# Altium PCB PCB.ESP8266.PcbDoc
Units mil, origin at the board's own origin, x right, y up, seen from the top; angles counter-clockwise.
Board outline 1050 x 1810 mil, 2 copper layers (Top Layer, Bottom Layer); 27 components, 25 nets, 139 pads, 161 vias.
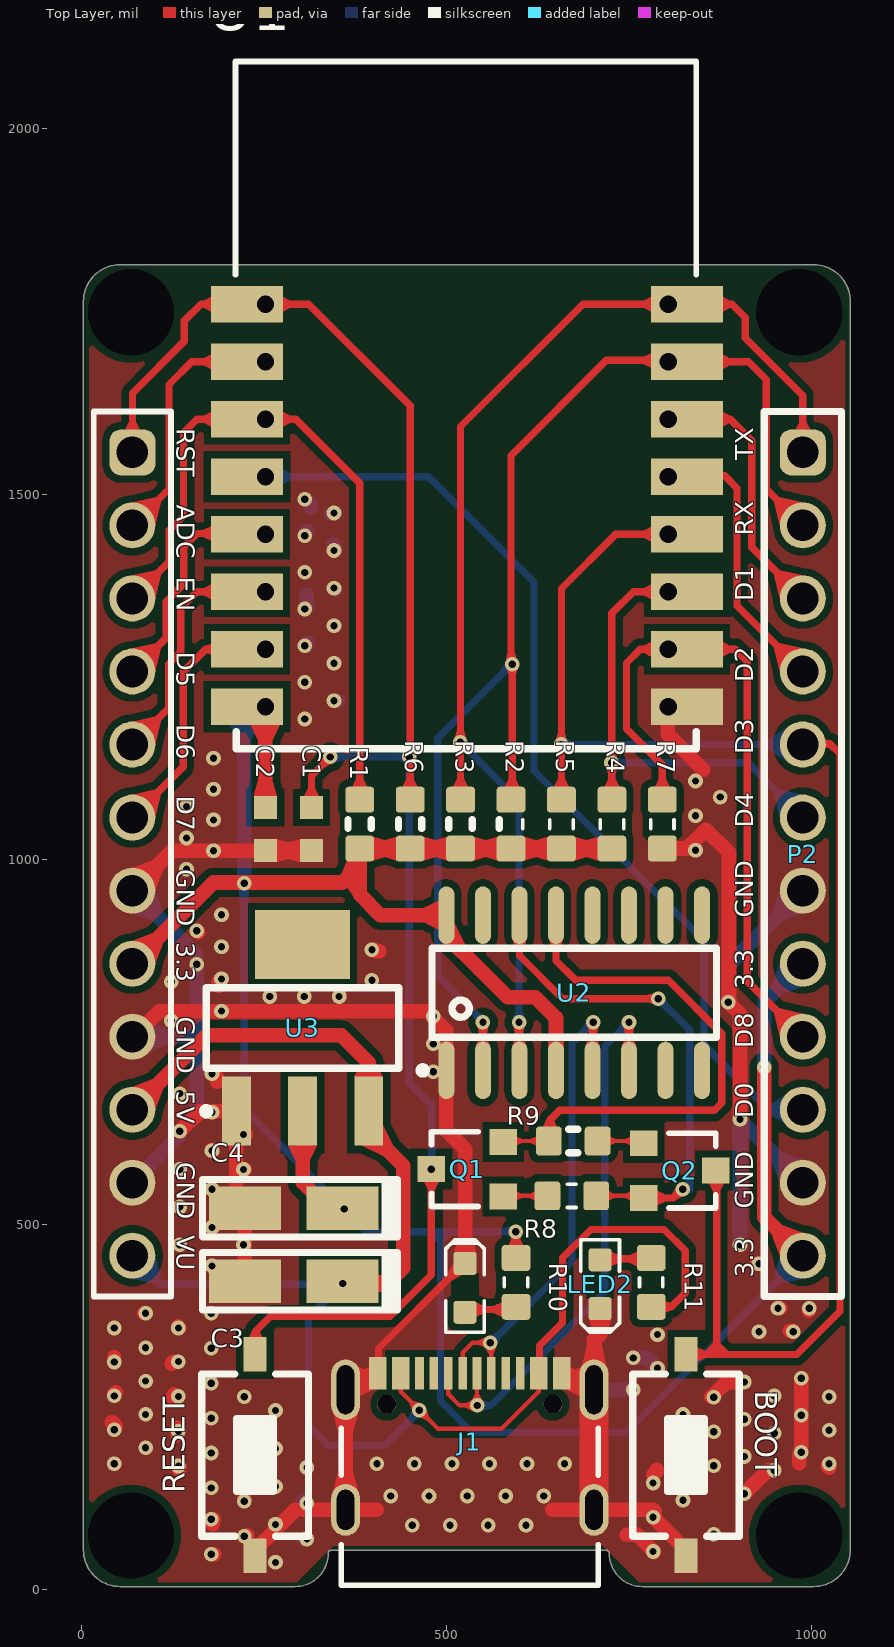
[diagram p0: Top Layer view]
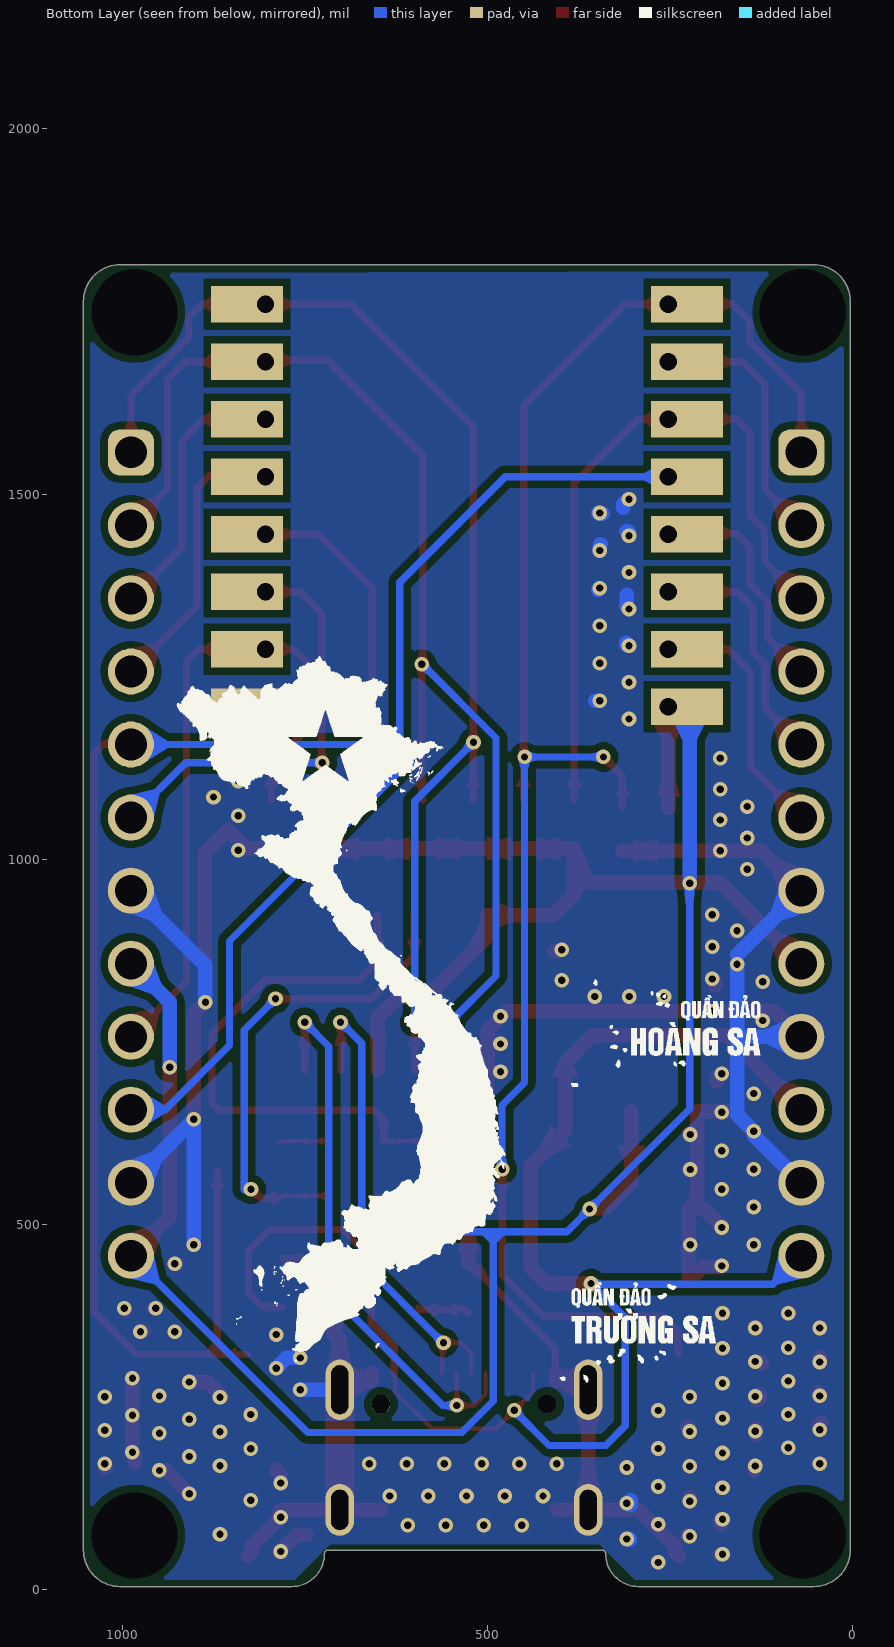
[diagram p1: Bottom Layer view, seen from below]
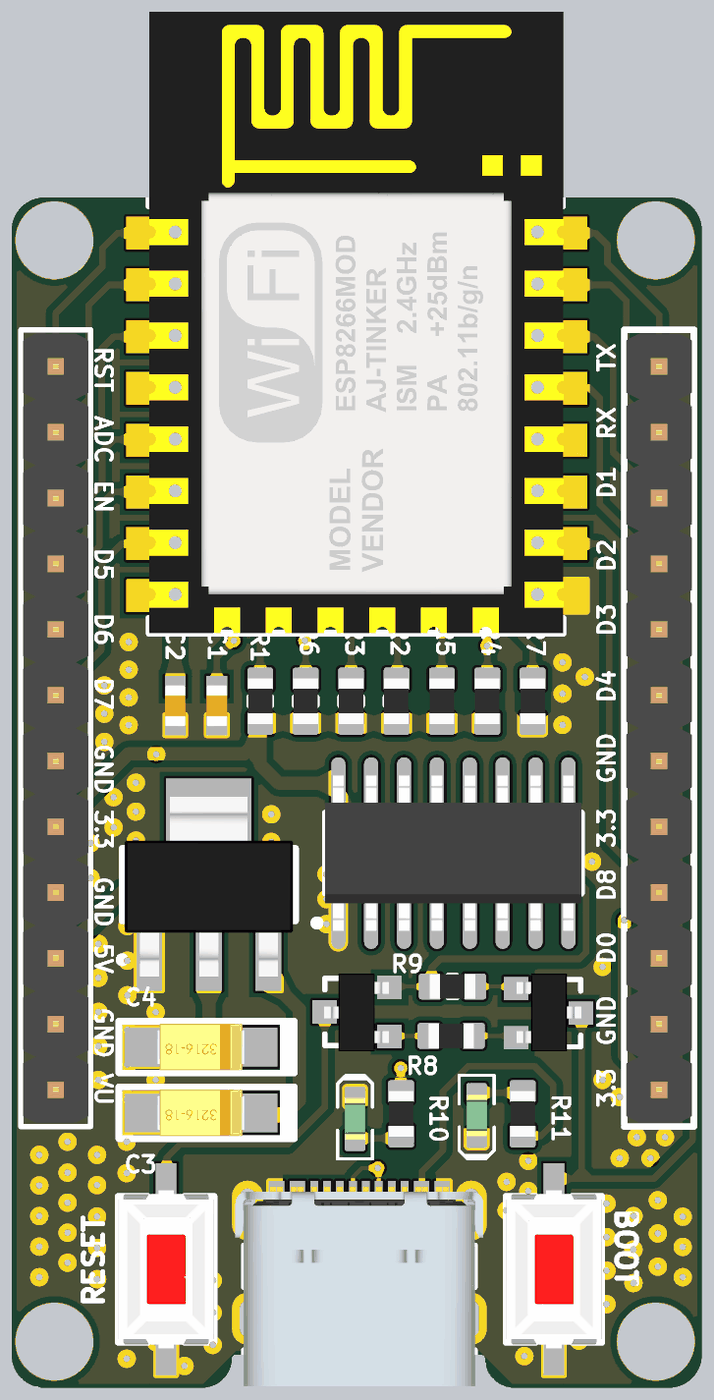
[diagram p2: 3D render of the assembled board from above, using the file's embedded part models]

## Layer stack, top to bottom
Top Solder: solder mask 0.4, Solder Resist, Dk 3.5
Top Layer: signal copper 1.4
Dielectric 1: dielectric 12.6, FR-4, Dk 4.8
Bottom Layer: signal copper 1.4
Bottom Solder: solder mask 0.4, Solder Resist, Dk 3.5

## Board outline
53,4 293,4 ccw(c293,49) 338,49 cw(c343,49) 343,54 718,54 cw(c718,49) 723,49 ccw(c768,49) 768,4 1003,4 ccw(c1003,54) 1053,54 1053,1764 ccw(c1003,1764) 1003,1814 53,1814 ccw(c53,1764) 3,1764 3,54 ccw(c53,54)

## Design rules (kind name [scope] priority, off if disabled: settings)
Clearance [All] p1: gap=10 ignorepadtopadclearanceinfootprint=FALSE
PlaneConnect [All] p1: planeconnectstyle=Direct reliefexpansion=20 reliefentries=4 reliefconductorwidth=10 reliefairgap=10
PolygonConnect [All] p1: connectstyle=Direct reliefconductorwidth=10 reliefentries=4 polygonreliefangle="90 Angle" airgapwidth=10
RoutingVias [All] p1: holewidth=28 width=50 viastyle="Through Hole" minholewidth=10 minwidth=20 maxholewidth=30 maxwidth=20
SolderMaskExpansion [All] p1: expansion=4 istentingtop=FALSE
Width [All] p1: maxlimit=20 minlimit=6 preferedwidth=10
29 further rules are at their usual default settings.

## Classes and differential pairs
component class SCH.ESP8266: BOOT C1 C2 C3 C4 J1 Q1 Q2 R1 R2 R3 R4 R5 R6 R7 R8 R9 R10 R11 RESET U1 U2 U3

## Components (designator, comment, footprint, x,y, rotation, side; value= is the part's Value field where it differs from the comment)
BOOT "SW" SW1-SMD 828,184 r270 top value="SW chip 2 pin"
C1 "100nF, 25V" WCAP-CSGP_0603_L1.6W0.8H0.8_Reflow 315.14,1041.11 r270 top
C2 "100nF, 25V" WCAP-CSGP_0603_L1.6W0.8H0.8_Reflow 251.98,1041.11 r90 top
C3 "10uF" "tu tantalum smd3216" 291,422 r180 top
C4 "10uF" "tu tantalum smd3216" 291,522 r180 top
J1 "629722000214" 629722000214 532,154 r0 top
LED1 "Green" LED-0603-GREEN 525.41,413.03 r90 top
LED2 "Green" LED-0603-GREEN 710.41,417.95 r270 top
P1 "61301211121" 61301211121 70,1007 r270 top
P2 "61301211121" 61301211121 988,1007 r270 top
Q1 "2N222" SOT23-231 528.62,575.47 r90 top value=C1815
Q2 "2N222" SOT23-231 819.62,573.58 r270 top value=C1815
R1 "Thick Film" RESC1608X55N 381.25,1048 r90 top value=10K
R2 "Thick Film" RESC1608X55N 588.44,1048 r90 top value=10K
R3 "Thick Film" RESC1608X55N 519.38,1048 r90 top value=10K
R4 "Thick Film" RESC1608X55N 726.57,1048 r90 top value=10K
R5 "Thick Film" RESC1608X55N 657.51,1048 r90 top value=10K
R6 "Thick Film" RESC1608X55N 450.31,1048 r90 top value=10K
R7 "Thick Film" RESC1608X55N 795.64,1048 r90 top value=10K
R8 "Thick Film" RESC1608X55N 671.62,539 r0 top value=10K
R9 "Thick Film" RESC1608X55N 673.62,614.07 r180 top value=10K
R10 "Thick Film" RESC1608X55N 595.41,420.45 r270 top value=1K5
R11 "Thick Film" RESC1608X55N 780.41,420.45 r90 top value=1K5
RESET "SW" SW1-SMD 238,184 r270 top value="SW chip 2 pin"
U1 "ESP 12" ESP12E 528,1484.3 r0 top
U2 "CH340G" SO16 675,817 r90 top
U3 "LM1117-3.3V" SOT223 303,769 r0 top

## Footprints (in the part's own frame and the unit in brackets; to place one, negate y for a bottom-side part, rotate by r counter-clockwise, add the part's x,y. Pads: shape width x height; smd on the part's side, far side on the other; paste and mask are expansions set on the pad)
61301211121 [mm] "Pin Header, pitch 2.54 mm, THT, Vertical, single row, 12p"
  rrect50% 1.6x1.6 hole 1.1: 1(-13.97,0)
  round 1.6 hole 1.1: 2(-11.43,0) 3(-8.89,0) 4(-6.35,0) 5(-3.81,0) 6(-1.27,0) 7(1.27,0) 8(3.81,0) 9(6.35,0) 10(8.89,0) 11(11.43,0) 12(13.97,0)
  silkscreen extent -15.39,-1.35 15.39,1.35, body extent -15.24,-1.27 15.24,1.27, height 8.57
629722000214 [mm] "USB TYPE C VERTICAL PLUG"
  rect 0.6x1.14 smd: A1/B12(-3.2,3.605) A4/B9(-2.4,3.605) A9/B4(2.4,3.605) A12/B1(3.2,3.605)
  rect 0.3x1.14 smd: A5(-1.25,3.605) A6(-0.25,3.605) A7(0.25,3.605) A8(1.25,3.605) B5(1.75,3.605) B6(0.75,3.605) B7(-0.75,3.605) B8(-1.75,3.605)
  round 0.65 hole 0.65 unplated: MH1(-2.89,2.535) MH2(2.89,2.535)
  oval 1x1.8 hole 0.6 slot 1.4 at 90 deg: Shell(-4.32,-1.145) Shell(4.32,-1.145)
  oval 1x2.1 hole 0.6 slot 1.7 at 90 deg: Shell(-4.32,3.035) Shell(4.32,3.035)
  silkscreen extent -4.47,-3.76 4.47,1.7, body extent -4.79,-3.76 4.79,3.95, height 3.33
ESP12E [mm]
  rect 2.5x1.27 hole 0.6 copper offset -0.65,0: 1(-7,7) 2(-7,5) 3(-7,3) 4(-7,1) 5(-7,-1) 6(-7,-3) 7(-7,-5) 8(-7,-7)
  rect 2.5x1.27 hole 0.6 copper offset 0.65,0: 9(7,-7) 10(7,-5) 11(7,-3) 12(7,-1) 13(7,1) 14(7,3) 15(7,5) 16(7,7)
  silkscreen extent -8.05,-8.46 7.98,15.44, body extent -8.02,-8.46 7.99,15.54, height 2.65
LED-0603-GREEN [mm]
  round 0.254 on Mech15: 0(0,0)
  rrect25% 0.8x0.8 smd: A(-0.85,0) K(0.85,0)
  Top Layer pour cut-out: -0.5,0.5 0.5,0.5 0.5,-0.5 -0.5,-0.5
  silkscreen extent -1.55,-0.67 1.68,0.67, body extent -0.8,-0.4 0.8,0.4, height 0.75
RESC1608X55N [mm] "Chip Resistor, Body 1.6x0.8mm, EIA 0603, IPC Medium Density"
  round 0.254 on Mech15: 0(0,0)
  rrect25% 0.9x1 smd: 1(-0.85,0) 2(0.85,0)
  Top Layer pour cut-out: -0.6,0.5 -0.4,0.7 0.4,0.7 0.6,0.5 0.6,-0.5 0.4,-0.7 -0.4,-0.7 -0.6,-0.5
  silkscreen extent -0.15,-0.41 0.15,0.41, body extent -0.87,-0.47 0.88,0.48, height 0.54
SO16 [mm] "SOIC, 16-Leads, Body 9.90x3.91mm, Pitch 1.27mm, IPC Medium Density"
  oval 2x0.55 smd: 1(-2.7,4.445) 2(-2.7,3.175) 3(-2.7,1.905) 4(-2.7,0.635) 5(-2.7,-0.635) 6(-2.7,-1.905) 7(-2.7,-3.175) 8(-2.7,-4.445) 9(2.7,-4.445) 10(2.7,-3.175) 11(2.7,-1.905) 12(2.7,-0.635) 13(2.7,0.635) 14(2.7,1.905) 15(2.7,3.175) 16(2.7,4.445)
  silkscreen extent -2.82,-4.95 1.55,5.39, body extent -3,-4.95 3,4.95, height 1.4
SOT23-231 [mm]
  rect 0.9x0.95 smd mask+0: 1(0.95,-1.25)
  rect 0.9x0.95 smd: 2(-0.95,-1.25) 3(0,1.25)
  silkscreen extent -1.3,-0.38 1.3,1.25, body extent -1.52,-1.23 1.48,1.27, height 1.06
SOT223 [mm]
  rect 1x2.4 smd: 1(-2.3,-2.9) 2(0,-2.9) 3(2.3,-2.9)
  rect 3.3x2.4 smd: 4(0,2.9)
  silkscreen extent -3.47,-3.02 3.35,1.4, body extent -3.25,-3.56 3.25,3.4, height 1.68
SW1-SMD [mm]
  rect 1.2x0.8 smd: 1(-3.5,0) 2(3.5,0)
  silkscreen extent -2.82,-1.85 2.82,1.85, body extent -3.05,-1.85 3.05,1.85, height 2.5
"tu tantalum smd3216" [mm]
  rect 2.5x1.5 smd: 1(-1.7,0) 2(1.7,0)
  silkscreen extent -3.61,-1 3.17,1, body extent -1.7,-0.9 1.7,0.9, height 1.69
WCAP-CSGP_0603_L1.6W0.8H0.8_Reflow [mm] "Ceramic Capacitors, body 1.6x0.8mm"
  rect 0.8x0.8 smd: 1(-0.75,0) 2(0.75,0)
  body extent -0.8,-0.4 0.8,0.4, height 0.8

## Part data
BOOT RESET: library part SW2, "Switch button 2 pin"
C1 C2: library part 885012206071, "WCAP-CSGP Multilayer Ceramic Chip Capacitor, General Purpose, size 0603, X7R, 100nF, 25V", Capacitance=100nF, Capacitance Tolerance=+/-10%, Isolation Resistance=5GOhm, Manufacturer="Wurth Elektronik", Operating Temperature max.=125C, Operating Temperature min.=-55C, Rated Voltage=25V, Ceramic Type=X7R, ComponentLink1Description="Manufacturer Link", ComponentLink1URL=http://www.we-online.de, ComponentLink2Description=Datasheet, ComponentLink2URL=https://www.we-online.com/catalog/datasheet/885012206071.pdf, Dissipation Factor=3.5%, Height=0.8mm, Length=1.6mm, Manufacturer Part Number=885012206071, Mounting Technology=SMT, Packaging="Tape and Reel", Size=0603, Technical Reference=X7R0603104K025DFCT10000, Width=0.8mm
C3 C4: library part "Tu tantalum 10uF 16V SMD3216", "Dán", Chung_Loai=Dán, Don_Vi=Con, Ma_Hang=MH001954, So_Chan=2, Ten_Linh_Kien="Tụ tantalum 106C-10uF 16V SMD3216"
J1: "WR-COM USB 2.0 Type C Receptacle Horizontal SMT", Manufacturer="Wurth Elektronik", Operating Temperature Max=85°C, Operating Temperature Min=-40°C, Rated Current=5A, Working Voltage="20V (DC)", Application="USB 2.0", Category="Input/Output Connectors", ComponentLink1Description="Website Link", ComponentLink1URL=https://www.we-online.com/redexpert/article/629722000214?ad, ComponentLink2Description="Datasheet Link", ComponentLink2URL=https://www.we-online.com/redexpert/spec/629722000214?ad, Gender=Receptacle, Interface Type="Type C", Manufacturer Part Number=629722000214, Match Code=WR-USB, Mount="Surface Mount", Number of Pins=16, Number of Ports=1, Orientation=Horizontal, Packaging="Tape and Reel"
LED1 LED2: library part LED_SMD_Green_0603_525nm_350mcd, "LED 0603 SMD Green 525nm 350mcd 20mA", Current - Test=20mA, Manufacturer 1=Kingbright, Manufacturer 2="Kingbright Company LLC", Manufacturer Part Number 1=APT1608ZGCK, Manufacturer Part Number 2=APT1608-WAP24, Package / Case="0603 (1608 metric)", Ratings="200mcd min; 350 mcd typ @ 20mA", Supplier Part Number 1=604-APT1608ZGCK, Voltage - Forward (Vf) @ 10mA=3.1V, Voltage - Forward (Vf) @ 20mA=3.3V, Color=Green, ComponentLink1Description=http://www.mouser.com/ds/2/216/APT1608ZGCK-262051.pdf, ComponentLink1URL=http://www.mouser.com/ds/2/216/APT1608ZGCK-262051.pdf, ComponentLink2Description="APT1608-WAP24 Datasheet", ComponentLink2URL="\\SVFI2\PBLShare\Eng\Electrical Engineering\Hardware\Altium\Libraries and Templates\Unreleased Components\Part Number Request 2013-10-02\APT1608-WAP24(Ver.1B).pdf", Lens Style/Size="Rectangle with Flat Top, 1.2mm x 0.8mm", Material=InGaN, SCDType=source, Supplier 1=Mouser, Viewing Angle=120°
P1 P2: "WR-PHD Pin Header, THT, pitch 2.54mm, Single Row, Vertical, 12p", Contact Resistance=20mOhm, Manufacturer="Wurth Elektronik", Operating Temperature="-40 to +105degC", Rated Current=3A, Withstanding Voltage=500VAC, Working Voltage=250VAC, ComponentLink1Description=Manufacturer, ComponentLink1URL=http://www.we-online.de, ComponentLink2Description=Datasheet, ComponentLink2URL=https://www.we-online.com/catalog/datasheet/61301211121.pdf, Gender="Pin Header", Manufacturer Part Number=61301211121, Mounting Technology=THT, Orientation=Vertical, Packaging=Bag, Pin Number=12, Pitch=2.54mm, Row Number=Single
Q1 Q2: "NPN 600mW, ECB"
R1 R2 R3 R4 R5 R6 R7 R8 R9: library part RES_10K_0603_1%, "Resistor SMD chip 10k Ohm 0.1W 1% 0603", Manufacturer 1=Yageo, Manufacturer Part Number 1=RC0603FR-0710KL, Package / Case="0603 (1608 Metric)", Ratings=1/10W, Supplier Part Number 1=311-10.0KHRCT-ND, Tolerance=±1%, SCDType=spec, Supplier 1=Digi-Key
R10 R11: library part RES_1K5_0603_5%, "Resistor SMD chip 1.5k Ohm 0.1W 5% 0603", Manufacturer 1=Yageo, Manufacturer Part Number 1=RC0603JR-071K5L, Package / Case="0603 (1608 metric)", Ratings="1/10 W", Supplier Part Number 1=311-1.5KGRCT-ND, Tolerance=±5%, Material="thick film", SCDType=spec, Supplier 1=Digi-Key
U1: library part ESP_12, IC=ESP8266-EX, Vendor=Ai-thinker
U2: "High and Low Side Driver", ComponentLink1Description="Manufacturer Link", ComponentLink1URL=http://www.irf.com/, ComponentLink2Description=Datasheet, ComponentLink2URL=http://www.irf.com/product-info/datasheets/data/ir2110.pdf, DatasheetVersion=PD60147J, LatestRevisionDate=04-Mar-2005, LatestRevisionNote="Stylized 3D Model Added.", Note="Pins 4, 8 and 14 are not connected", PackageDescription="DIP; 14 Leads; Row Spacing 7.62 mm; Pitch 2.54 mm", PackageReference=PDIP14, Published=8-Jun-2000, Publisher="Altium Limited"
U3: library part LM1117, "800mA Low-Dropout Linear Regulator", Creator="Nguyen Ba Bien", Website=http://group3i.net

## Free pads (board coordinates)
  round 60 hole 118.11: 2(68,1749) 3(68,74) 4(983,1749) 5(983,74)

## Via types
v1: diameter 20, hole 10, Top Layer to Bottom Layer, 161 vias

## Nets (pads, with @x,y where several pads share a name; then routed paths per layer and width w, separated by ;. In a path a pad name is that pad's centre, name@x,y a point inside that pad or via, vN(x,y) a via of type N, cw(c..) or ccw(c..) an arc to the next point about the centre after c; other vN are vias at no path point)
+3.3: C2.2 C4.1 P1.8 P2.8 P2.12 R1.1 R2.1 R3.1 R4.1 R5.1 R6.1 R10.1 U1.8 U2.4 U2.16 U3.2 | length 3847.3
  Top Layer w10: v1(595,490) 595,454.33 R10.1
  Top Layer w20: P1.8 181,968 223,968 357.12,968 381.25,992.13 ; C2.2 251.98,1208.27 U1.8 ; U3.2 303,557.24 338.24,522 C4.1 ; U2.4 650,782.64 621.64,811 583.76,811 544.62,850.13 500,894.76 U2.16 409.7,923.3 381.25,951.75 381.25,992.13 ; R4.1 R5.1 R2.1 R3.1 R6.1 R1.1 381.25,992.13 ; v1(935,715) 935,510 P2.12
  Bottom Layer w10: v1(223,967) 223,658 v1(360,521) 391,490 492,490 ; v1(595,490) 492,490 ; P2.12 746,215 535,215 492,258 492,490
  Bottom Layer w20: v1(223,967) 223,1193.71 238,1208.71 U1.8 ; v1(935,715) 935,804 P2.8
ADC: P1.2 U1.2 | length 360.4
  Top Layer w10: P1.2 120,1507 120,1650 151.15,1681.15 U1.2 ; P1.2@87.48,1449 P1.2@88.48,1450
D0: P2.10 U1.4 | length 1329.5
  Bottom Layer w10: U1.4 475.33,1523.67 620,1379 620,1121 853,888 853,745 941,657 P2.10
D1: P2.3 U1.14 | length 371.6
  Top Layer w10: U1.14 888.59,1602.41 918,1573 918,1427 P2.3
D2: P2.4 U1.13 | length 390.3
  Top Layer w10: U1.13 804.92,1525 881,1525 898,1508 898,1347 P2.4
D3: BOOT.1 P2.5 Q2.3 R5.2 U1.12 | length 2105
  Top Layer w10: R5.2 657.51,1370.51 731.93,1444.93 U1.12 ; BOOT.1 870,321.8 ; Q2.3 870,572.42 870,321.8 ; P2.5 989,1158 1025,1158 1039,1144 1039,381 979.8,321.8 870,321.8
  Bottom Layer w10: v1(657,1157) P2.5
D4: P2.6 R4.2 U1.11 | length 637.5
  Top Layer w10: R4.2 726.57,1336.57 756.19,1366.19 U1.11
  Bottom Layer w10: v1(726,1132) 913,1132 P2.6
D5: P1.4 U1.5 | length 319.7
  Top Layer w10: P1.4 116.31,1303.31 116.31,1352.81 140.5,1377 140.5,1427.5 159,1446 251.34,1446 U1.5
D6: P1.5 U1.6 | length 339.9
  Top Layer w10: P1.5 119.5,1206.5 119.5,1267 136.31,1283.81 136.31,1344.31 158.19,1366.19 U1.6
D7: P1.6 U1.7 | length 354
  Top Layer w10: P1.6 139.5,1126.5 139.5,1256.5 170.45,1287.45 U1.7
D8: P2.9 R7.2 U1.10 | length 933
  Top Layer w10: R7.2 795.64,1129.36 746.57,1178.43 746.57,1268.57 765.45,1287.45 U1.10 895.55,1287.45 912,1271 912,833 P2.9
D+: J1.A6 J1.B6 U2.5 | length 676.8
  Top Layer w6: J1.A6 522.16,324.16 536,338 v1(560,338) 561.53,336.47 J1.B6
  Top Layer w10: U2.5 700.5,711.2 700.5,775.5 v1@701,776
  Bottom Layer w10: v1@561,338 672,449 672,748 700,776 v1@701,776
  other v1: 701,776.5
D-: J1.A7 J1.B7 U2.6 | length 806.1
  Top Layer w6: J1.B7 502.47,267.53 518,252 v1(542,252) 541.92,252.08 541.92,295.85 J1.A7
  Top Layer w10: U2.6 750,774 749,775 749,776 749.5,776.5 v1(750,776.5)
  Bottom Layer w10: v1@543,252 561,252 717,408 717,743.5 v1(750,776.5)
EN: P1.3 R1.2 U1.3 | length 974.5
  Top Layer w10: P1.3 120.5,1407.5 120.5,1450.5 140,1470 140,1584 158.41,1602.41 U1.3 293.59,1602.41 381.25,1514.75 R1.2
GND: BOOT.2 C1.2 C2.1 C3.2 C4.2 J1.A1/B12 J1.A12/B1 J1.Shell LED1.K LED2.K P1.7 P1.9 P1.11 P2.7 P2.11 R7.1 RESET.2 U1.9 U2.1 U3.1 | length 4900.5
  Top Layer w10: J1.A1/B12@407.02,295.93 407.02,330.02 512.75,435.75 514.66,435.75 LED1.K
  Top Layer w20: 42,229 47,224 v1@47,223 ; v1(45,172) v1@46,172 ; v1@45,266 45,268 v1@47,270 ; v1@45,316 v1@45,318 ; P1.9 72,757 107,792 v1(192,792) 473,792 ; P1.7 124.58,1011.58 C2.1 C1.2 ; v1@86,378 v1@87,378 ; v1(123,779) v1@123,780 ; v1@124,309 124,310 v1@126,312 ; v1@127,267 127,262 v1@130,259 ; v1@131,221 131,219 132,218 v1@132,212 ; v1@133,360 133,359 v1@134,358 ; v1@134,163 134,168 v1(133,169) 134,169 v1@135,168 ; v1(135,627.25) 162.58,654.83 U3.1 U3.1@212.45,632.69 ; v1(158,902) v1@160,900 ; v1(179,443) 180.47,441.53 204.54,441.53 C3.2 C4.2 ; v1@179,601 v1@179,602 ; v1@180,89 180,95 v1@181,96 ; v1@181,48 v1@182,48 ; C4.2@181,497 181,498.61 204.39,522 C4.2 ; v1@181,706 186,701 186,695 ; v1@188,827 188,832 v1@190,834 ; v1@212.45,575 U3.1@212.45,632.69 ; v1@223,121 v1@223,126 ; v1@224,575 223,574 212.45,574 212.45,533.62 C4.2 ; v1@225,222 v1@226,222 ; U3.1@225,623 v1(222.13,623) U3.1@212.45,632.69 ; v1@226,73 v1@227,74 ; RESET.2 243.75,51.95 243.75,59.83 266,82.08 v1(266,89) 272.92,89 292.84,108.92 ; 304,108.92 J1.Shell@361.92,108.92 ; v1(353,812) v1@354,813 ; v1@401,876 403,874 408,874 ; 404.75,109 362,109 J1.Shell@361.92,108.92 ; J1.A1/B12@405.7,295.93 405.7,286.2 404.2,284.71 370.87,284.71 361.92,275.76 361.92,273.49 J1.Shell@361.92,108.92 ; v1@482,783 499.68,765.32 ; 499.68,764 499.68,711.02 U2.1 500,629 526,603 526,447.08 LED1.K ; 645.13,108.92 J1.Shell@702.08,108.92 ; J1.A12/B1@658.3,295.93 658.3,286.2 659.8,284.71 J1.Shell@693.13,284.71 ; J1.Shell@702.08,273.49 702.08,342 ; J1.Shell@703.08,108.92 783.08,108.92 785,107 785,97.08 822.25,59.83 822.25,51.95 BOOT.2 ; J1.Shell@703.08,284.71 703.08,342 710.41,349.33 LED2.K ; 747,75 761,75 784,52 v1@784,51 ; 783,157 788,162 788,164 ; R7.1 829,1014.54 ; U1.9 803,1208.11 803,1171 851.5,1122.5 ; v1(841,1012) 841,1013 834.23,1019.77 855,1040.54 887,1008.54 887,985 ; v1@863,264 883,284 v1(908,284) ; v1@874,1085 v1(875,1085) ; 887,983 887,805 v1(886,804) 902,788 v1(902,644) ; v1(908,131) 940,163 v1(949,163) ; v1@925,446 v1(928,446) ; v1(954,385) v1@957,385 ; v1@970,354 974,354 v1(975,353) ; 983,173 983,185 v1(986,188) 986,288 v1@987,289 ; v1@996,382 v1@997,383 ; v1@1022,169 v1@1024,167
  Top Layer w40: J1.Shell@702.08,108.92 J1.Shell@702.08,273.49
  Bottom Layer w20: P1.11 135,622 v1(135,627.25) 158,650.25 158,757 ; P1.9 158,757 ; P1.7 158,869 ; v1@158,857 158,757 ; v1@304,116 v1@304,122 ; v1@305,68 v1@305,69 ; v1@306,1447 308,1449 v1@310,1449 ; v1@307,1493 314,1486 314,1481 ; 309,1362 309,1348 v1@310,1347 ; v1@310,1294 v1@310,1296 ; v1@342,1473 347,1473 v1@348,1474 ; v1@345,1431 346,1430 v1@346,1426 ; v1@347,1370 348,1369 v1@348,1368 ; v1@351,1217 v1@352,1217 ; J1.Shell@703.08,273.49 v1@757,273.49 ; v1(756,317) 775,317 v1(789,303) ; v1(886,804) 886,855 P2.7 ; v1(902,472) v1@902,643 ; v1(902,644) v1@902,643 ; P2.11 v1@902,643
  other v1: 266,37 178,48 783,52 309,69 223,73 866,75.44 453,88 505,88 557,88 609,88 178,96 783,98.89 309,118 223,120.75 824,122.33 423.75,128 476.17,128 528.58,128 581,128 633.42,128 178,139 266,141 783,145.78 309,167 223,168.5 866,169.22 404.8,172 456.2,172 507.6,172 559,172 610.4,172 661.8,172 1024,172 908,182 178,186.8 266,193 824,192.67 88,194 949,214 223,216.25 866,216.11 133,216.67 45,218.5 1024,218 908,233 178,234.6 986,238.5 88,239.67 824,239.56 266,245 866,263 133,264.33 223,264 1024,264 45,265 949,265 756,273.49 178,282.4 88,285.33 986,289 45,311.5 133,312 178,330.2 88,331 789,349 928,353 45,358 133,358 88,378 178,378 997,385 135,472 222.13,472 179,495.6 135,523.75 179,548.2 222.13,575 135,575.5 179,600.8 179,653.4 135,679 179,706 482,709 482,747 482,785 258,812 305.5,812 123,832 398,834 192,836 158,856 398,876 192,880 192,924 144,986 181,1011.58 144,1029 181,1053.72 841,1059.5 144,1072 181,1095.86 841,1107 181,1138 306,1192 346,1217 306,1242.17 346,1268.4 306,1292.33 346,1319.8 306,1342.5 346,1371.2 306,1392.67 346,1422.6 306,1442.83 346,1474 306,1493
NetLED1_A: LED1.A R10.2 | length 73.1
  Top Layer w6: R10.2@593.19,384.76 R10.2
  Top Layer w10: LED1.A 529.12,383.28 591.7,383.28 R10.2@593.19,384.76
NetLED2_A: LED2.A R11.2 | length 72.1
  Top Layer w8: R11.2@777.91,451.42 R11.2@779.16,452.67
  Top Layer w10: LED2.A 711.66,452.67 776.66,452.67 R11.2@777.91,451.42 ; R11.2@779.16,452.67 R11.2
NetQ1_1: Q1.1 R9.2 U2.13 | length 747.8
  Top Layer w6: Q1.1@594.03,614.07 R9.2
  Top Layer w8: Q1.1@592.84,612.87 Q1.1@594.03,614.07
  Top Layer w10: R9.2 642,615.91 642,643 655,656 867,656 877,666 877,761 804,834 677,834 650,861 U2.13
NetQ1_2: Q1.2 R8.1 | length 60.7
  Top Layer w6: Q1.2@592.84,538.07 593.77,539 R8.1@653.16,539
NetQ2_1: Q2.1 R8.2 U2.14 | length 659.3
  Top Layer w6: R8.2@720.09,539 782.59,539 Q2.1@785.41,536.18
  Top Layer w10: U2.14 600,868 659,809 v1(790,809) ; Q2.1@785.41,536.18 785.59,536 810.62,536 822.62,548 v1(823.62,548)
  Bottom Layer w10: v1(790,809) 833,766 v1@833,547
NetQ2_2: Q2.2 R9.1 | length 64.6
  Top Layer w6: R9.1@722.09,614.07 782.33,614.07 Q2.2@785.41,610.99
RST: C1.1 P1.1 Q1.3 R6.2 RESET.1 U1.1 | length 2344.5
  Top Layer w10: P1.1 70,1638 141.09,1709.09 141.09,1737.09 163.89,1759.89 U1.1 311.11,1759.89 450.31,1620.69 R6.2 ; P1.1@87.48,1549 P1.1@90,1551.52 ; RESET.1 239,322.8 239,354 259,374 422.72,374 479.41,430.7 v1(479.41,575.47) ; C1.1 315.14,1114.14 v1(341,1140)
  Bottom Layer w10: v1(341,1140) v1(449,1140) 449,694 480,663 v1@480,574.66
RX: P2.2 R2.2 U1.15 U2.2 | length 1732
  Top Layer w10: U2.2 v1@550,778 ; R2.2 590,1083.02 v1(590,1267) 588.44,1268.56 588.44,1552.44 719,1683 801.74,1683 U1.15 913.57,1681.15 938,1656.72 938,1507 P2.2
  Bottom Layer w10: v1@550,778 488,840 488,1166 589,1267 v1(590,1267)
  other v1: 550,776.5
TX: P2.1 R3.2 U1.16 U2.3 | length 1677.9
  Top Layer w10: R3.2 519.38,1592.38 686.89,1759.89 U1.16 891.11,1759.89 909.31,1741.69 909.31,1713.69 988,1635 P2.1 ; v1(599.5,776.5) 599.5,711.2 U2.3
  Bottom Layer w10: v1(519,1160) 599.5,1079.5 v1(599.5,776.5)
VIN: C3.1 J1.A4/B9 J1.A9/B4 P1.10 P1.12 R11.1 U3.3 | length 2236.1
  Top Layer w6: J1.A4/B9 437.51,270.93 v1(462.98,245.46) 488.44,220 575.56,220 626.49,270.93 J1.A9/B4
  Top Layer w10: J1.A9/B4@627.49,295.93 627.49,333.49 659,365 659,454 698,493 798,493 827,464 827,406 807.99,386.99 R11.1
  Top Layer w20: P1.10 172,759 356,759 393.55,721.45 U3.3 393.55,627.27 440.71,580.11 440.71,440.71 419,419 v1(358,419)
  Bottom Layer w10: P1.12 109,418 v1@357,418 ; v1(358,419) v1@357,418 ; v1@463.98,245.46 415.51,197 338,197 311,224 311,372 v1@357,418
pads on no net: J1.A5 J1.A8 J1.B5 J1.B8 J1.MH1 J1.MH2 LED1.0 LED2.0 R1.0 R2.0 R3.0 R4.0 R5.0 R6.0 R7.0 R8.0 R9.0 R10.0 R11.0 U2.7 U2.8 U2.9 U2.10 U2.11 U2.12 U2.15 U3.4

## Polygon pours and split planes (outlines as drawn)
GND on Bottom Layer "GND" (solid, remove dead copper, pour order 1): 12,1804.97 12,13 298,13 347,62 715,62 764,13 1044,13 1044,1803.01
GND on Top Layer "GND" (solid, remove dead copper, pour order 0): 11,1802.49 11,10 295,10 345,60 714,60 764,10 1054,10 1046,18 1046,1801.5

## Silkscreen, mask and mechanical layers (free items; w line width, h text height)
Top Overlay:
  text "RST" at 131,1590 h25 r270
  text "TX" at 920,1546 h25 r90
  text "ADC" at 131,1485 h25 r270
  text "RX" at 920,1443 h25 r90
  text "EN" at 131,1387 h25 r270
  text "D1" at 920,1353 h25 r90
  text "D5" at 131,1284 h25 r270
  text "D2" at 920,1242 h25 r90
  text "D6" at 131,1185 h25 r270
  text "D3" at 920,1144 h25 r90
  text "D7" at 131,1087 h25 r270
  text "D4" at 920,1043 h25 r90
  text "GND" at 131,986 h25 r270
  text "GND" at 920,920 h25 r90
  text "3.3" at 131,886 h25 r270
  text "3.3" at 920,822 h25 r90
  text "GND" at 131,784 h25 r270
  text "D8" at 920,741 h25 r90
  text "5V" at 131,683 h25 r270
  text "D0" at 920,645 h25 r90
  text "GND" at 131,585 h25 r270
  text "GND" at 920,521 h25 r90
  text "VU" at 131,485 h25 r270
  text "3.3" at 920,427 h25 r90
Bottom Overlay:
  drawing of 104 lines, arcs and shapes, not listed